# Altium PCB PCB1.PcbDoc
Units mm, origin at the board's own origin, x right, y up, seen from the top; angles counter-clockwise.
Board outline 152.4 x 101.6 mm, 2 copper layers (Top Layer, Bottom Layer); 5 components, 3 nets, 7 pads, 0 vias.
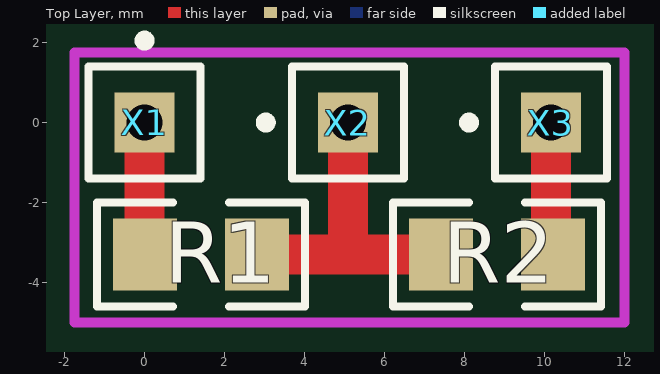
[diagram p0: Top Layer view]
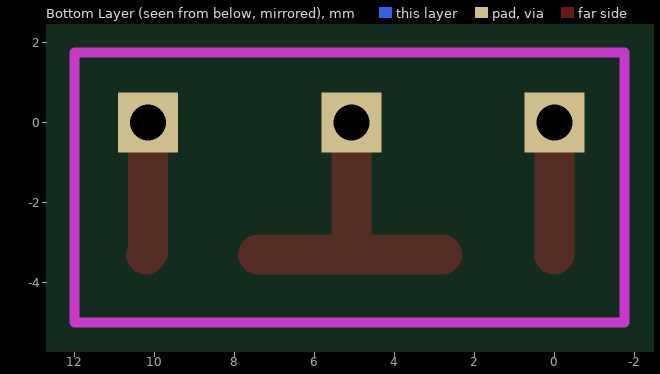
[diagram p1: Bottom Layer view, seen from below]

## Layer stack, top to bottom
Top Layer: signal copper 0.0356
Dielectric: dielectric 0.32, FR-4, Dk 4.8
Bottom Layer: signal copper 0.0356

## Board outline
-79.756,-44.704 72.644,-44.704 72.644,56.896 -79.756,56.896

## Design rules (kind name [scope] priority, off if disabled: settings)
Clearance [All] p1: gap=0.254
ComponentClearance [All] p1: gap=0.254 collisioncheckmode=0
PolygonConnect [All] p1: connectstyle=Relief reliefconductorwidth=0.254 reliefentries=4 polygonreliefangle="90 Angle"
RoutingLayers [All] p1: top layer=Horizontal bottom layer=Vertical
RoutingVias [All] p1: holewidth=0.711 width=1.27 viastyle="Through Hole" minholewidth=0.711 minwidth=1.27 maxholewidth=0.711 maxwidth=1.27
SolderMaskExpansion [All] p1: expansion=0.102
TestPointUsage [All] p1: valid=0 allowmultiple=FALSE
Testpoint [All] p1: side=15 testpointundercomponent=TRUE minsize=1.016 maxsize=2.54 preferedsize=1.524 minholesize=0 maxholesize=1.016 preferedholesize=0.813 testpointgrid=0.025 style=1023 order=1234567890
Width [All] p1: maxlimit=1 minlimit=0.254 preferedwidth=0.254 toplayer_prefwidth=0.5 minimp=50.000000 maximp=50.000000 favimp=50.000000
16 further rules are at their usual default settings.

## Components (designator, comment, footprint, x,y, rotation, side; value= is the part's Value field where it differs from the comment)
R1 "10K" _1206 1.4,-3.3 r180 top
R2 "220" _1206 8.8,-3.3 r180 top
X1 "" PIN1 0,0 r0 top
X2 "" PIN1 5.08,0 r90 top
X3 "" PIN1 10.16,0 r90 top

## Footprints (in the part's own frame and the unit in brackets; to place one, negate y for a bottom-side part, rotate by r counter-clockwise, add the part's x,y. Pads: shape width x height; smd on the part's side, far side on the other; paste and mask are expansions set on the pad)
_1206 [mm]
  rect 1.6x1.8 smd: 1(-1.412,-0.007) 2(1.388,-0.007)
  silkscreen extent -2.61,-1.31 2.59,1.29
PIN1 [mm]
  rect 1.5x1.5 hole 0.9: 1(0,0)
  silkscreen extent -1.4,-1.4 1.4,2.17

## Part data
R1 R2: library part Res2, "Resistor"
X1 X2 X3: library part Socket, "Socket"

## Nets (pads, with @x,y where several pads share a name; then routed paths per layer and width w, separated by ;. In a path a pad name is that pad's centre, name@x,y a point inside that pad or via, vN(x,y) a via of type N, cw(c..) or ccw(c..) an arc to the next point about the centre after c; other vN are vias at no path point)
NetR1_1: R1.1 R2.2 X2.1 | length 8.5
  Top Layer w1: R1.1 4.957,-3.293 5.08,-3.17 X2.1 ; 4.407,-3.293 R2.2
NetR1_2: R1.2 X1.1 | length 3.3
  Top Layer w1: X1.1 0,-3.281 R1.2
NetR2_1: R2.1 X3.1 | length 3.3
  Top Layer w1: X3.1 10.16,-3.241 R2.1

## Keep-outs
Keep-Out Layer:
  lines w0.254: -1.75,-5 12,-5 12,1.75 -1.75,1.75 -1.75,-5